# Altium PCB pcb1.PcbDoc (part 2 of 3)
Units mil, origin at the board's own origin, x right, y up, seen from the top; angles counter-clockwise.
Board outline 6735 x 5870 mil, 4 copper layers (Top Layer, Layer 1, Layer 2, Bottom Layer), stack 16.756 mil thick; 178 components, 184 nets, 959 pads, 712 vias.
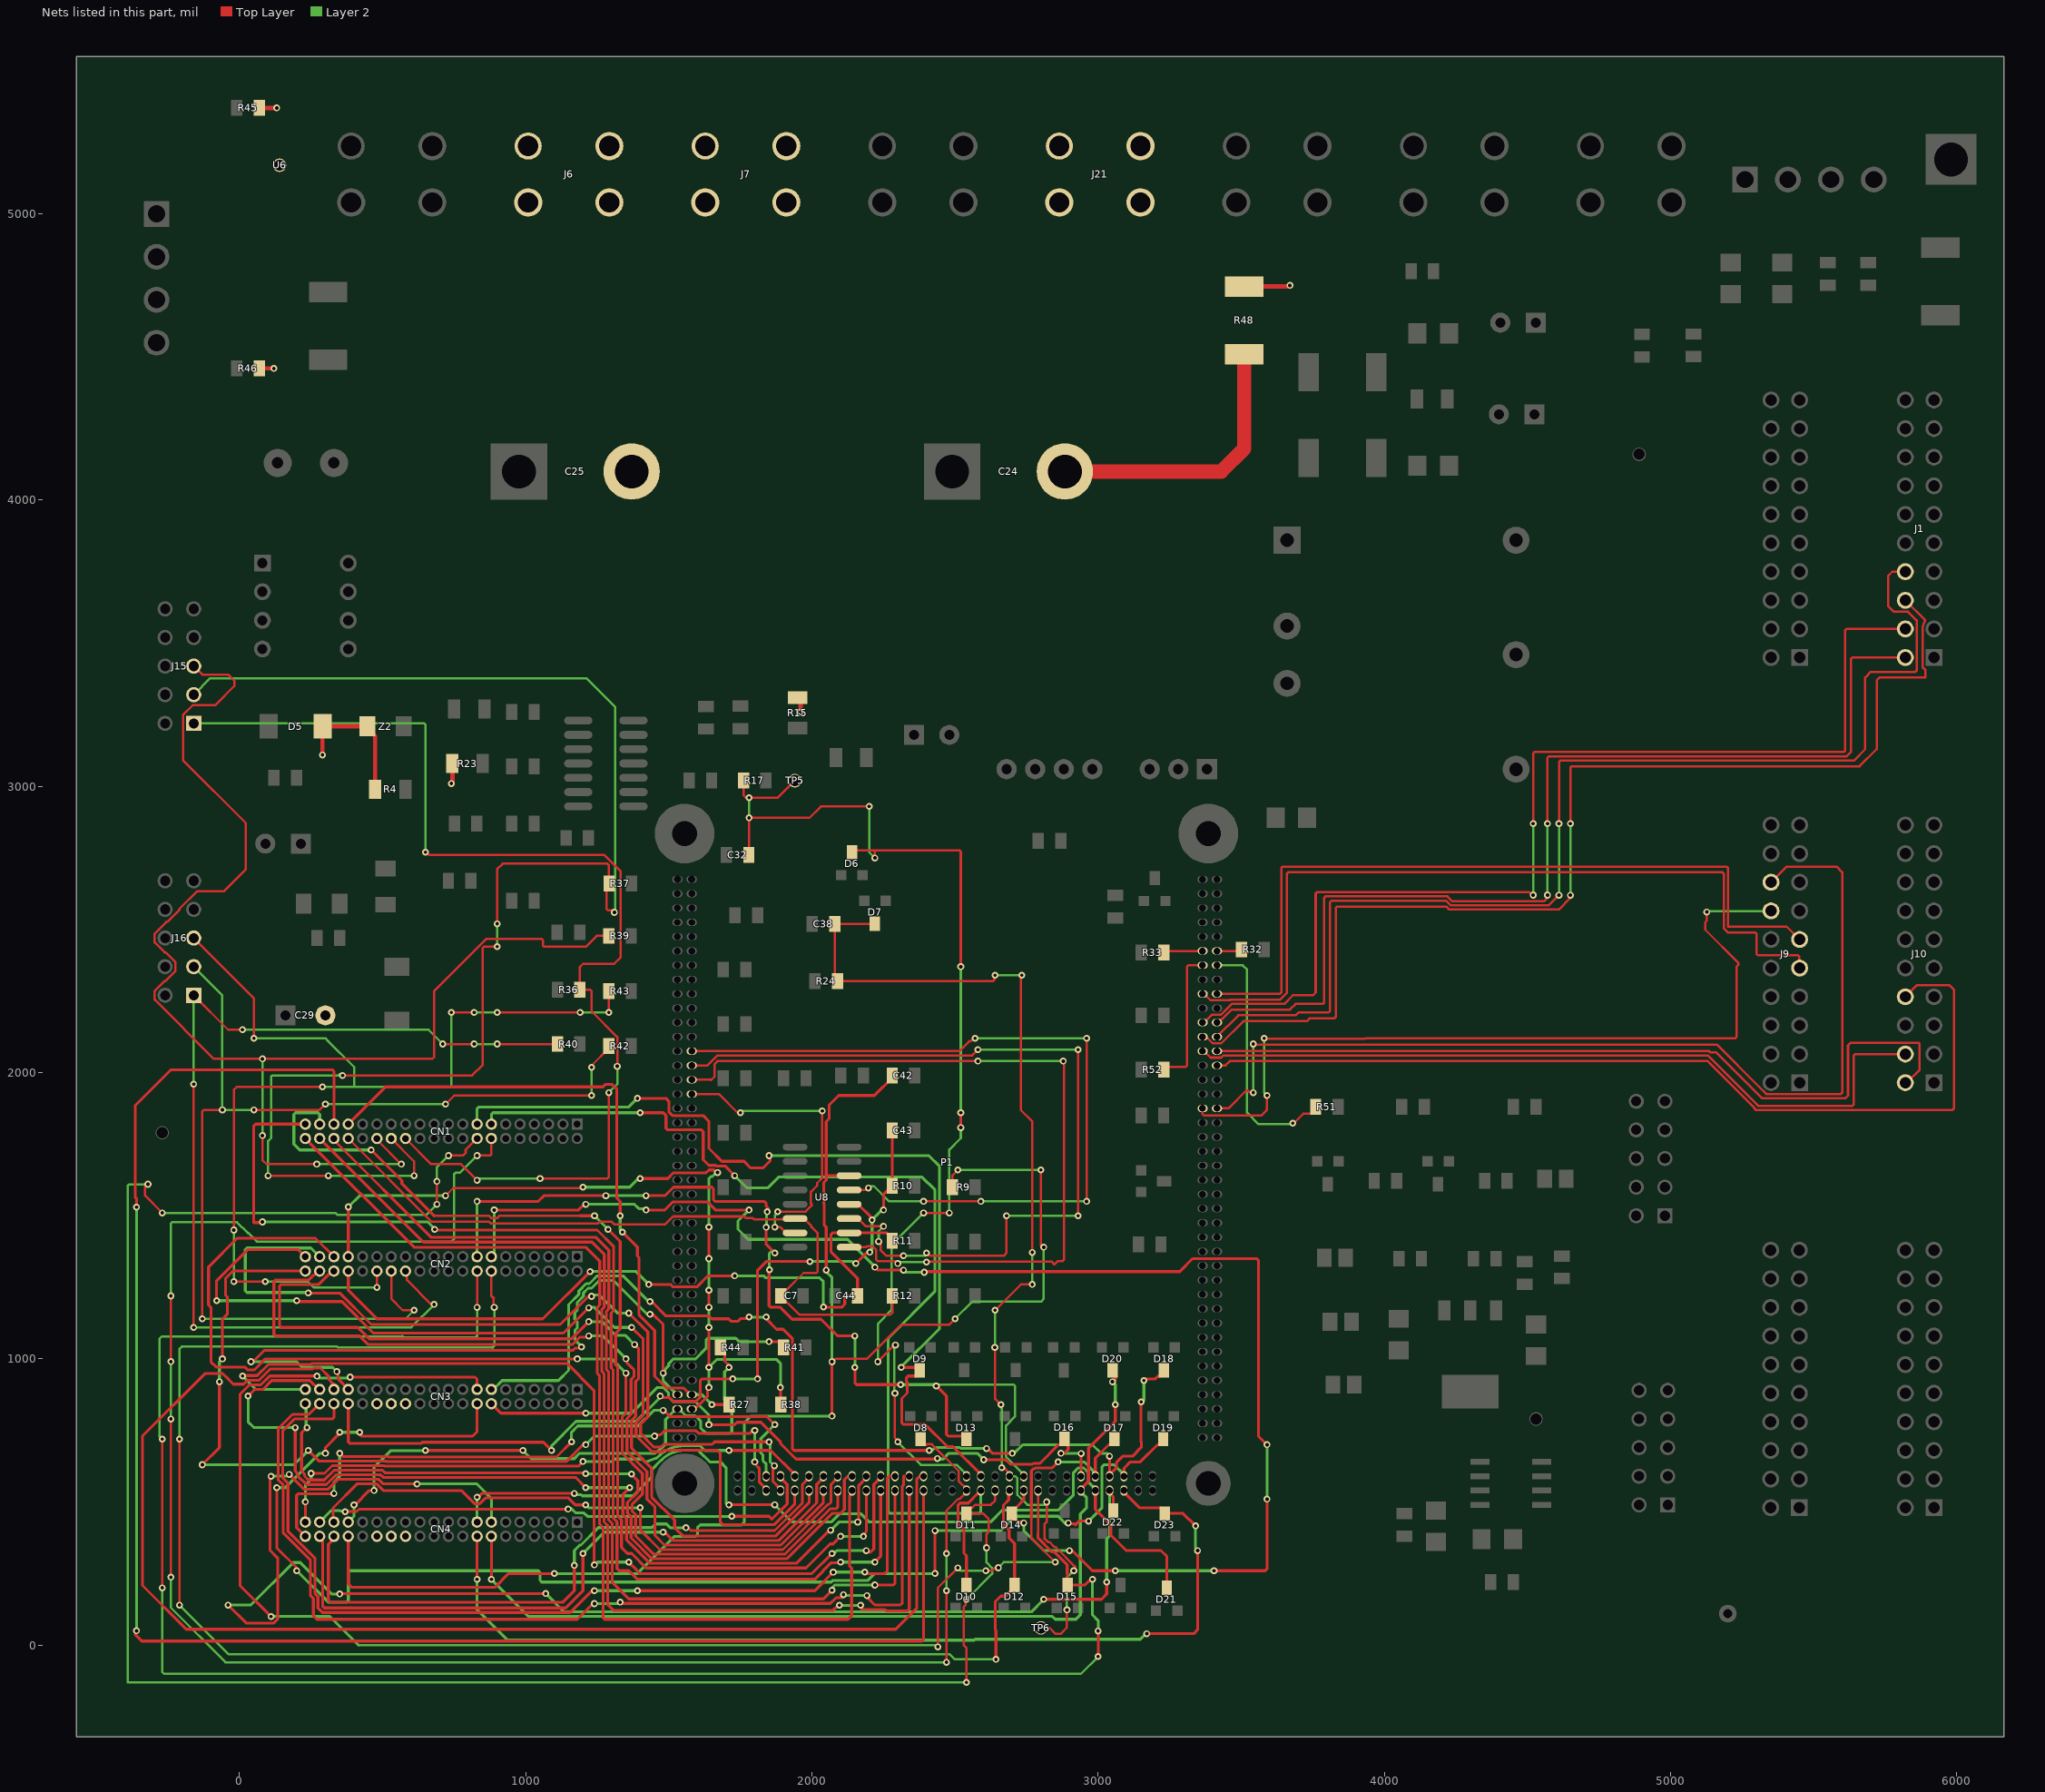
[diagram p4: the nets of this part, all layers, seen from the top]

## Via types
v1: diameter 24, hole 12, Top Layer to Bottom Layer, 712 vias

## Nets (pads, with @x,y where several pads share a name; then routed paths per layer and width w, separated by ;. In a path a pad name is that pad's centre, name@x,y a point inside that pad or via, vN(x,y) a via of type N, cw(c..) or ccw(c..) an arc to the next point about the centre after c; other vN are vias at no path point) (continued)
DSP-PWM1A: CN1.35 P1.193 | length 6070.9
  Top Layer w10: v1(-360,50) -362.68,47.32 -362.68,39.64 -364.8,37.51 -341.57,14.28 2384.14,14.28 2390,20.14 P1.193@2390,540 ; v1(-360,1530) -360,1560 -364.8,1564.8 -364.8,1884.28 -239.09,2010 324.14,2010 330,2004.14 CN1.35@330,1820
  Layer 2 w10: v1(-360,50) v1(-360,1530)
DSP-PWM1B: CN1.38 P1.195 | length 3897.3
  Top Layer w10: CN1.38@280,1770 642,1408 1232,1408 1274.5,1365.5 1274.5,1181.57 1266,1173.07 1266,955.81 1273.5,948.31 1273.5,430.43 1286.67,417.26 1286.67,140.55 1305.72,121.5 2073.85,121.5 2088.94,136.6 2093.3,136.6 v1(2095.71,139) ; v1(2170,139) 2170,138.5 2174.78,133.72 2174.78,125.07 2175.86,124 2255.7,124 2259.7,120 2334.14,120 2340,125.86 P1.195@2340,540
  Layer 2 w10: v1(2095.71,139) v1(2170,139)
DSP-PWM2A: CN1.36 P1.197 | length 3661.5
  Top Layer w10: CN1.36@330,1770 330,1764 670,1424 1246,1424 1290.5,1379.5 1290.5,1174.94 1282,1166.44 1282,962.44 1289.5,954.94 1289.5,437.06 1302.67,423.89 1302.67,218.42 1359.59,161.5 2040,161.5 v1(2070,191.5) ; v1(2220,210) 2284.14,210 2290,215.86 P1.197@2290,540
  Layer 2 w10: v1(2070,191.5) 2070,200 2080,210 v1(2220,210)
DSP-PWM2B: CN1.39 P1.199 | length 4152.4
  Top Layer w10: v1(80,1478.5) 77.36,1475.86 50,1475.86 50,1814.14 55.86,1820 143.96,1820 CN1.39@230,1820 ; v1(681.81,1452.5) 684.31,1450 1250,1450 1306.5,1393.5 1306.5,1168.31 1298,1159.81 1298,969.07 1305.5,961.57 1305.5,443.69 1318.67,430.52 1318.67,267.19 1325.86,260 1360,260 1389.7,230.3 2010,230.3 2067.5,287.8 2097.8,287.8 v1(2100,290) ; v1(2220,290) 2240,310 P1.199@2240,540
  Layer 2 w10: v1(80,1478.5) 657.24,1478.5 677.24,1458.5 677.24,1457.07 v1(681.81,1452.5) ; v1(2100,290) v1(2220,290)
DSP-PWM3A: CN1.37 P1.201 | length 3695.2
  Top Layer w8: 680,1500 871.11,1500 878.61,1492.5 901.39,1492.5 908.89,1500 1190,1500
  Top Layer w10: v1(460,1730) 567.39,1622.61 567.39,1612.61 680,1500 ; 1190,1500 v1(1240.3,1500) ; v1(1287.8,1452.5) 1330,1410.3 1330,1104.64 1314,1088.64 1314,979 1321.5,971.5 1321.5,450.31 1334.67,437.14 1334.67,341.19 1355.86,320 1370.3,320 1420.8,269.5 1979.2,269.5 2063.21,353.51 2073.51,353.51 2099.85,379.85 v1(2100.15,379.85) ; v1(2180,380) 2180,386.76 2190,396.76 P1.201@2190,540
  Layer 2 w10: CN1.37@280,1820 280,1854.14 274.14,1860 195.86,1860 190,1854.14 190,1750 210,1730 v1(460,1730) ; v1(1240.3,1500) v1(1287.8,1452.5) ; v1(2100.15,379.85) 2100.23,379.92 2179.92,379.92 v1(2180,380)
DSP-PWM3B: CN1.40 P1.203 | length 3783.3
  Top Layer w10: CN1.40@230,1770 610,1390 1210,1390 1258.5,1341.5 1258.5,1188.19 1250,1179.69 1250,949.19 1257.5,941.69 1257.5,423.8 1270,411.3 1270,95.86 1275.86,90 2125.64,90 2138.5,102.86 2138.5,268.83 2131.5,275.83 2131.5,521.94 2140,530.44 P1.203@2140,540
DSP-PWM4A: CN2.35 P1.205 | length 3822
  Top Layer w10: CN2.35@330,1356.67 265.17,1421.5 -8.19,1421.5 -108.5,1321.19 -108.5,1188.19 -100,1179.69 -100,989.69 -81.81,971.5 18.19,971.5 28.19,961.5 51.81,961.5 90.31,1000 v1(1180,1000) ; v1(1350,950) 1350,810.81 1337.5,798.31 1337.5,669.87 1407.67,599.7 1407.67,527.97 1371.5,491.81 1371.5,468.19 1384,455.69 1384,381.25 1447.75,317.5 1904.87,317.5 2063.37,476 2084.14,476 2090,481.86 P1.205@2090,540
  Layer 2 w10: v1(1180,1000) 1300,1000 v1(1350,950)
DSP-PWM4B: CN2.38 P1.207 | length 3020.4
  Top Layer w10: CN2.38@280,1306.67 273.4,1306.67 242.71,1275.98 125.86,1275.98 120,1270.12 120,1085.86 125.86,1080 420.31,1080 450.31,1050 1162.63,1050 1187.84,1075.22 1215.22,1075.22 v1(1220,1080) ; 1354,986.31 1368,972.31 1378.5,961.81 1378.5,938.19 1368,927.69 1368,806.19 1353.5,791.69 1353.5,676.5 1423.67,606.33 1423.67,510.6 1451.5,482.77 1451.5,382.69 1484.7,349.5 1891.62,349.5 2040,497.88 P1.207@2040,540
  Layer 2 w10: v1(1220,1080) 1270,1080 v1(1350,1000)
DSP-PWM5A: CN2.36 P1.209 | length 2958.3
  Top Layer w10: CN2.36@330,1306.67 323.4,1306.67 276.71,1259.98 145.86,1259.98 140,1254.12 140,1115.86 145.86,1110 412.93,1110 452.93,1070 1160,1070 v1(1220,1130) ; v1(1380,1050) 1394.5,1035.5 1394.5,931.57 1384,921.07 1384,799.56 1369.5,785.06 1369.5,688.25 1439.67,618.08 1439.67,517.23 1520,436.9 1520,409.69 1548.2,381.5 1874.13,381.5 1990,497.37 P1.209@1990,540
  Layer 2 w10: v1(1220,1130) 1266.37,1130 1314.87,1081.5 1348.5,1081.5 v1(1380,1050)
DSP-PWM5B: CN2.39 P1.211 | length 3307.9
  Top Layer w10: v1(-80,1203.5) -80,1272.93 28.42,1381.35 205.32,1381.35 CN2.39@230,1356.67 ; v1(200,1203.5) 203.5,1200 357.37,1200 467.37,1090 1131.42,1090 v1(1220.03,1178.61) ; v1(1370,1110) 1410.5,1069.5 1410.5,803.43 1385.5,778.43 1385.5,731.57 1441.57,675.5 1478.43,675.5 1483.26,680.33 1669.67,680.33 1680,670 1680,430 1688.69,421.31 1868.69,421.31 1940,492.63 P1.211@1940,540
  Layer 2 w10: v1(-80,1203.5) v1(200,1203.5) ; v1(1220.03,1178.61) 1221.42,1180 1240,1180 1310,1110 v1(1370,1110)
DSP-PWM6A: CN2.37 P1.213 | length 3004.8
  Top Layer w10: v1(240,1230) 350,1230 460,1120 1120.3,1120 1220.2,1219.9 1221.72,1218.38 v1(1230,1218.38) ; v1(1360,1159.69) 1360.61,1159.69 1426.5,1093.81 1426.5,796.81 1401.5,771.81 1401.5,738.19 1448.2,691.5 1471.8,691.5 1481.8,701.5 1651.48,701.5 1659.98,710 1849.7,710 v1(1850,709.69) ; v1(1868.5,626.69) 1863.72,621.91 1863.72,605.45 1863.5,605.23 1863.5,572 1890,545.5 P1.213@1890,540
  Layer 2 w10: v1(240,1230) 238,1232 25.86,1232 20,1237.86 20,1381.49 25.86,1387.35 249.32,1387.35 CN2.37@280,1356.67 ; v1(1230,1218.38) 1234.78,1223.16 1254.08,1223.16 1255.46,1224.54 1320,1160 1359.7,1160 v1(1360,1159.69) ; v1(1850,709.69) 1853.8,705.9 1853.8,641.4 v1(1868.5,626.69)
DSP-PWM6B: CN2.40 P1.215 | length 3224.5
  Top Layer w10: v1(-130,630) -70,690 v1(-70,920) ; v1(-60,1000) -60,1138.54 -43,1155.54 -43,1215.92 -48.5,1221.42 -48.5,1281.81 -23.64,1306.67 CN2.40@230,1306.67 ; v1(240,680) 277,643 512.66,643 514.66,641 1140.7,641 1199.7,700 v1(1210,700) ; v1(1450,730) 1454.78,734.78 1470.75,734.78 1484.46,748.5 1595.23,748.5 1603.73,740 1783.24,740 1793.24,750 v1(1800,750) ; v1(1800,640) 1800,633.24 1816.5,616.74 1816.5,569 1840,545.5 P1.215@1840,540
  Layer 2 w10: v1(-130,630) 190,630 v1(240,680) ; v1(-70,920) -70,990 v1(-60,1000) ; v1(1210,700) 1240,730 v1(1450,730) ; v1(1800,640) v1(1800,750)
DSP-PWM7A: CN3.35 P1.194 | length 4646.7
  Top Layer w10: CN3.35@330,893.33 330,911.5 328.19,911.5 311.5,928.19 311.5,939.05 282.55,968 258.94,968 255.44,964.5 107.43,964.5 68.43,925.5 28.53,925.5 14.53,911.5 -21.81,911.5 -38.5,928.19 -38.5,928.81 -58.19,948.5 -121.5,948.5 -338.94,731.06 -338.94,208.12 -186.32,55.5 2292.27,55.5 2366.5,129.73 2366.5,580.64 2375.86,590 P1.194@2390,590
DSP-PWM7B: CN3.38 P1.196 | length 3477.2
  Top Layer w10: CN3.38@280,843.33 242.67,806 185.35,806 134.58,755.24 134.58,577.94 153,559.53 153,390.98 248,295.98 248,172.6 258,162.6 258,102 270,90 1180,90 1234.87,144.87 v1(1240,144.87) ; v1(1330,150) 1334.5,145.5 2064.3,145.5 2084.02,165.22 2104.14,165.22 2110,171.07 v1(2110,176.17) ; v1(2191.98,173.11) 2191.98,168.02 2220,140 2309.14,140 2315,145.86 2315,553.73 2320,558.73 2320,590 P1.196@2340,590
  Layer 2 w10: v1(1240,144.87) 1324.87,144.87 v1(1330,150) ; v1(2110,176.17) 2112.46,173.7 2191.39,173.7 v1(2191.98,173.11)
DSP-PWM8A: CN3.36 P1.198 | length 3331.2
  Top Layer w10: CN3.36@330,843.33 330,795.86 324.14,790 191.97,790 150.58,748.61 150.58,584.57 169,566.15 169,397.6 264,302.6 264,179.23 274,169.23 274,129.23 289.23,114 1155.2,114 1231.2,190 v1(1240,190) ; v1(1390,190) 2010,190 v1(2074.5,254.5) ; v1(2184.7,255.3) 2190,250 2254.94,250 2263.34,258.39 2263.34,524.6 2263.5,524.77 2263.5,583.5 2270,590 P1.198@2290,590
  Layer 2 w10: v1(1240,190) v1(1390,190) ; v1(2074.5,254.5) 2074.9,254.9 2184.29,254.9 v1(2184.7,255.3)
DSP-PWM8B: CN3.39 P1.200 | length 3439.7
  Top Layer w10: v1(10.5,940) 12,941.5 61.81,941.5 100.81,980.5 248.81,980.5 252.31,984 1144.26,984 1238.5,889.76 1238.5,281.5 v1(1240,280) ; v1(1360,290) 1360,285.86 1365.86,280 1370,280 1391.31,258.69 1391.31,255.86 1397.17,250 2000,250 v1(2070,320) ; v1(2190,330) 2196.76,330 2202.62,324.14 2204.14,324.14 2216.5,336.5 2216.5,561 2240,584.5 P1.200@2240,590
  Layer 2 w10: v1(10.5,940) 57.17,893.33 CN3.39@230,893.33 ; v1(1240,280) 1250,290 v1(1360,290) ; v1(2070,320) 2076.76,320 2086.76,330 v1(2190,330)
DSP-PWM9A: CN3.37 P1.202 | length 3196.6
  Top Layer w10: v1(30,870) 53.5,893.5 81.69,893.5 112.21,924.02 245.92,924.02 276.61,893.33 CN3.37@280,893.33 ; v1(194.5,760) 194.5,608.03 203,599.53 203,591.85 233.85,561 303.22,561 337.22,595 492.78,595 501.78,586 1173.67,586 v1(1209.67,550) ; v1(1363.17,550) 1339.5,526.33 1339.5,454.94 1352,442.44 1352,368 1434.5,285.5 1945.5,285.5 2061.5,401.5 v1(2065.34,401.5) ; v1(2160,430) 2163.5,433.5 2163.5,558 2190,584.5 P1.202@2190,590
  Layer 2 w10: v1(30,870) 30,780 50,760 v1(194.5,760) ; v1(1209.67,550) v1(1363.17,550) ; v1(2065.34,401.5) 2093.84,430 v1(2160,430)
DSP-PWM9B: CN3.40 P1.204 | length 2669.7
  Top Layer w10: v1(235.5,760) 217,741.5 217,608.15 227,598.15 227,590.47 240.47,577 296.59,577 330.59,611 499.41,611 508.41,602 1207.03,602 v1(1209.67,599.36) ; v1(1369.28,597.78) 1371.5,595.57 1371.5,594.38 1391.67,574.21 1391.67,534.6 1355.5,498.43 1355.5,461.57 1368,449.07 1368,374.63 1441.13,301.5 1911.5,301.5 2070,460 2100,460 2113.5,473.5 2113.5,577.64 2125.86,590 P1.204@2140,590
  Layer 2 w10: CN3.40@230,843.33 232.75,840.58 232.75,762.75 v1(235.5,760) ; v1(1209.67,599.36) 1210.46,598.57 1368.49,598.57 v1(1369.28,597.78)
DSP-PWM10A: CN4.35 P1.206 | length 2151.5
  Top Layer w10: CN4.35@330,430 327,433 327,479.53 410.47,563 479.53,563 502.53,540 774.47,540 820.47,494 839.53,494 859.53,514 1149.22,514 1173.22,490 v1(1209.67,490) ; v1(1400,480) 1400,402.34 1468.84,333.5 1898.25,333.5 2056.75,492 2060,492 2066.5,498.5 2066.5,561 2090,584.5 P1.206@2090,590
  Layer 2 w10: v1(1209.67,490) 1219.67,480 v1(1400,480)
DSP-PWM10B: CN4.38 P1.208 | length 2332.1
  Top Layer w10: CN4.38@280,380 280,372.05 290,362.05 290,135.86 295.86,130 1140,130 1200,190 v1(1200,320) ; v1(1480,394.5) 1484.96,394.5 1513.96,365.5 1884.99,365.5 2016.5,497.01 2016.5,561 2040,584.5 P1.208@2040,590
  Layer 2 w10: v1(1200,320) 1274.5,394.5 v1(1480,394.5)
DSP-PWM11A: CN4.36 P1.210 | length 2239.2
  Top Layer w10: CN4.36@330,380 330,372.05 310.14,352.19 310.14,155.86 316,150 1130,150 1170,190 v1(1170,278.5) ; v1(1560,410) 1566.76,410 1576.76,400 1870,400 1966.5,496.5 1966.5,561 1990,584.5 P1.210@1990,590
  Layer 2 w10: v1(1170,278.5) 1170,330.3 1189.01,349.32 1192.71,349.32 1253.9,410.5 1440.8,410.5 1453.3,423 1491.8,423 1504.8,410 v1(1560,410)
DSP-PWM11B: CN4.39 P1.212 | length 1955.4
  Top Layer w10: CN4.39@230,430 v1(230,500.5) ; v1(250,600) 296.96,600 323.96,627 506.04,627 508.04,625 1183.5,625 v1(1200,641.5) ; v1(1710,680) 1855.5,680 1940,595.5 P1.212@1940,590
  Layer 2 w10: v1(230,500.5) 230,560 250,580 v1(250,600) ; v1(1200,641.5) 1302.85,641.5 1311.35,650 1407.44,650 1412.87,644.57 1415.77,641.67 1424.05,641.67 1456.17,653.24 1458.23,653.98 1462.37,658.1 cw(c1555,565) 1541.93,695.68 1548.37,696.33 1609.4,696.33 1612.33,693.4 1625.73,680 v1(1710,680)
DSP-PWM12A: CN4.37 P1.214 | length 1800.7
  Top Layer w10: v1(369.25,466.12) 370.13,467 409.53,467 417.4,474.87 v1(1148.04,474.87) ; v1(1720,450) 1850,450 1860,440 1913.5,493.5 1913.5,561 1890,584.5 P1.214@1890,590
  Layer 2 w10: CN4.37@280,430 320,470 350,470 351.2,468.8 366.58,468.8 v1(369.25,466.12) ; v1(1148.04,474.87) 1150.83,477.65 1159.11,477.65 1175.26,461.5 1203.43,461.5 1215.26,449.67 1719.67,449.67 v1(1720,450)
DSP-PWM12B: CN4.40 P1.216 | length 2279.3
  Top Layer w10: CN4.40@230,380 199.32,410.68 199.32,523.14 205.17,529 329,529 v1(330,530) ; v1(350,670) 361,659 519.29,659 521.29,657 1107,657 v1(1160,710) ; v1(1480,820) 1482.96,820 1504.46,798.5 1841.5,798.5 1869.85,770.15 v1(1870.15,770.15)
  Layer 2 w10: v1(330,530) 330,570 350,590 v1(350,670) ; v1(1160,710) 1160,743.7 1181.8,765.5 1392.27,765.5 1446.77,820 v1(1480,820) ; P1.216@1840,590 1840,632.57 1828.5,644.07 1828.5,664.37 1821.5,671.37 1821.5,721.81 1869.7,770 1870,770 v1(1870.15,770.15)
DSP_A_CAN_RX: J9.9 P1.18 | length 2839.2
  Top Layer w8: P1.18@3365,2275 3370.5,2275 3393,2252.5 3460.02,2252.5 3461.52,2254 3634.11,2254 3660,2279.89 3660,2695.31 3664.69,2700 5181.31,2700 5186,2695.31 5186,2504 5200,2490 5295.31,2490 5300,2485.31 5300,2414.69 5304.69,2410 5445.31,2410 5450,2405.31 5450,2365.91 J9.9@5450.91,2365
DSP_A_CAN_TX: J9.11 P1.17 | length 2701.3
  Top Layer w8: P1.17@3415,2275 3635.31,2275 3640,2279.69 3640,2715.31 3644.69,2720 5195.31,2720 5200,2715.31 5200,2510 5405.91,2510 J9.11@5450.91,2465
DSP_B_CAN_RX: J9.14 P1.34 | length 2878.4
  Top Layer w8: P1.34@3365,1875 3365,1855 3370,1850 3570,1850 3590,1870 v1(3590,1920) ; v1(3580,2120) 3582,2118 3933.29,2118 3935.29,2120 5225.31,2120 5230,2124.69 5230,2370 5236.69,2376.69 5236.69,2383.31 5121.25,2498.75 5121.25,2525.21 5126.5,2530.46 v1(5126.5,2561.25)
  Layer 2 w8: v1(3580,2120) 3580,1930 v1(3590,1920) ; v1(5126.5,2561.25) 5128.38,2563.12 5349.03,2563.12 J9.14@5350.91,2565
DSP_B_CAN_TX: J9.16 P1.33 | length 3507.6
  Top Layer w8: P1.33@3415,1875 3455,1875 3516.69,1936.69 3523.31,1936.69 3526.94,1933.06 3536.94,1933.06 3540,1930 v1(3542,1930) ; v1(3542,2100) 3544,2098 5162,2098 5310,1950 5334.53,1925.47 5595.31,1925.47 5600,1930.16 5600,2700 5580,2720 5405.91,2720 J9.16@5350.91,2665
  Layer 2 w8: v1(3542,1930) v1(3542,2100)
DSP_PWM1_\E\N\A\B\L\E: CN1.33 P1.153 R27.1 | length 2361.3
  Top Layer w10: CN1.33@380,1820 510,1950 1269.7,1950 1278.2,1958.5 1301.8,1958.5 1318.5,1941.8 1318.5,1561.5 1330,1550 v1(1330,1500) ; v1(1338.11,1442.5) 1390,1390.61 1390,1360 1395.25,1354.75 1395.25,1154.44 1450.5,1099.19 1450.5,939.19 1491.2,898.5 1551,898.5 1574.5,875 P1.153@1580,875 ; v1(1650,840) R27.1@1710.63,840
  Layer 2 w10: v1(1330,1500) 1330,1450.61 v1(1338.11,1442.5) ; P1.153@1580,875 1615,875 v1(1650,840)
DSP_PWM1_F\A\U\L\T\: P1.111 U8.7 | length 1100.3
  Top Layer w8: P1.111@1580,1925 1675,1925 1741.69,1858.31 1748.31,1858.31 v1(1750,1860) ; v1(1870,1460) 1890.22,1460 1910.22,1440 U8.7@1941.02,1440 ; v1(1880,1514.44) 1977.81,1514.44 1998.37,1535 1998.37,1541.63 1996.69,1543.31 1996.69,1583.32 2018.19,1604.83 2018.19,1613.93 2035,1630.74 2035,1865 v1(2036.25,1866.25)
  Layer 2 w8: v1(1750,1860) 1756.25,1866.25 v1(2036.25,1866.25) ; v1(1870,1460) 1870,1500.11 1880,1510.11 v1(1880,1514.44)
DSP_PWM1_F\A\U\L\T\_\5\V\: C7.1 CN1.34 R12.2 U8.6 | length 2598.2
  Top Layer w8: CN1.34@380,1770 670,1480 871.31,1480 878.81,1472.5 1251.7,1472.5 1259.2,1480 1299.2,1480 1309.2,1470 1487.68,1470 1515.18,1497.5 1763.61,1497.5 1768.61,1492.5 1792.5,1492.5 1797.5,1487.5 1938.52,1487.5 U8.6@1941.02,1490 1972.52,1490 1998,1464.52 1998,1460.89 2020,1438.89 2020,1304.69 2015.31,1300 1970.63,1300 1914.19,1243.56 1906.32,1243.56 1890.63,1227.87 C7.1@1890.63,1220 1890.63,1212.13 1906.32,1196.44 1914.19,1196.44 1957.13,1153.5 2038.02,1153.5 2038.09,1153.42 2273.42,1153.42 2280.63,1160.63 R12.2@2280.63,1220
DSP_PWM2_\E\N\A\B\L\E: CN2.33 P1.155 R38.1 | length 2808.7
  Top Layer w8: v1(720,1570) 746.5,1596.5 1196.5,1596.5 v1(1200,1600)
  Top Layer w10: CN2.33@380,1356.67 v1(380,1530.78) ; v1(1400,1630) 1496.27,1630 1516.27,1650 1630,1650 1640,1660 1657.21,1660 1666.21,1651 v1(1670,1651) ; P1.155@1580,825 1589.56,825 1600.06,835.5 1601.86,835.5 1635.22,868.86 1635.22,895.22 v1(1640,900) ; v1(1640,970) v1(1640,1110) ; v1(1640,1180) v1(1640,1240) ; v1(1640,1350) v1(1640,1460) ; v1(1890,900) 1890,840.63 R38.1@1890.63,840
  Layer 2 w10: v1(380,1530.78) 419.22,1570 v1(720,1570) ; v1(1200,1600) 1363.24,1600 1393.24,1630 v1(1400,1630) ; v1(1640,900) v1(1640,970) 1668.5,998.5 1875.64,998.5 1890,984.14 v1(1890,900) ; v1(1640,1110) v1(1640,1180) ; v1(1640,1240) v1(1640,1350) ; v1(1640,1460) 1640,1630 1647.07,1637.07 1652.28,1637.07 1666.21,1651 v1(1670,1651)
DSP_PWM2_F\A\U\L\T\: P1.109 U8.9 | length 2857.4
  Top Layer w8: P1.109@1580,1975 1645,1975 1646.69,1973.31 1660,1986.63 1660,2030 1670,2040 v1(2580,2040) ; U8.9@2130,1390 2188.89,1390 2193.26,1394.37 2211.49,1394.37 2224.37,1381.49 2224.37,1346.69 2229.06,1342 2291,1342 v1(2300,1333) ; v1(2400,1338) 2402,1340 2837.31,1340 2847.31,1330 2859.31,1342 2875.31,1342 2880,1346.69 2880,2038 v1(2878,2040)
  Layer 2 w8: v1(2300,1333) 2305,1338 v1(2400,1338) ; v1(2580,2040) v1(2878,2040)
DSP_PWM2_F\A\U\L\T\_\5\V\: C44.1 CN2.34 R11.2 U8.10 | length 2605.9
  Top Layer w10: CN2.34@380,1306.67 380,1240 480,1140 1059.7,1140 v1(1224.85,1305.15) ; v1(1430,1260) 1506.27,1260 1514.77,1251.5 1598.13,1251.5 1636.63,1290 v1(1730,1290) ; v1(2040.07,1180.92) 2040.99,1180 2103.43,1180 2114.78,1191.35 2114.78,1210.09 2124.68,1220 C44.1@2159.37,1220 2159.37,1280.63 2066,1374 2066,1434.14 2071.86,1440 U8.10@2130,1440 2261,1440 2280.63,1420.37 R11.2@2280.63,1412.5
  Layer 2 w10: v1(1224.85,1305.15) 1225.7,1306 1384,1306 v1(1430,1260) ; v1(1730,1290) 1831.2,1290 1838.2,1283 2027,1283 2040,1270 2040,1180.99 v1(2040.07,1180.92)
DSP_PWM3_\E\N\A\B\L\E: CN3.33 P1.154 R41.1 | length 2926.3
  Top Layer w10: v1(40,990) 47.68,990 87.68,1030 1165.25,1030 1172.35,1037.1 1190.03,1037.1 v1(1194.81,1041.88) ; v1(340,955.5) 344.78,950.72 344.78,928.55 CN3.33@380,893.33 ; v1(1434,1156) 1444,1156 1480,1120 v1(1480,950) ; v1(1850,1060) 1885.94,1060 1900.63,1045.31 R41.1@1900.63,1040
  Layer 2 w10: v1(40,990) 200,990 220,970 325.5,970 v1(340,955.5) ; v1(1194.81,1041.88) 1194.81,1043.45 1172.62,1065.65 1172.62,1101 1180,1108.38 1180,1129.69 1171.5,1138.19 1171.5,1161.81 1180,1170.31 1180,1197.37 1201.5,1218.87 1201.5,1230.19 1218.2,1246.88 1229.51,1246.88 1256.63,1274 1306,1274 1424.86,1155.14 1433.14,1155.14 v1(1434,1156) ; P1.154@1530,875 1527.93,875 1480,922.93 v1(1480,950) 1480,956.41 1499.77,976.19 1499.77,983.51 1515.65,999.39 1593.12,999.39 1630,1036.27 1630,1065.64 1635.86,1071.5 1733.8,1071.5 1745.3,1060 v1(1850,1060)
DSP_PWM3_F\A\U\L\T\: P1.107 U8.11 | length 3020.7
  Top Layer w8: P1.107@1580,2025 1635,2025 1670,2060 2560,2060 v1(2580,2080) ; U8.11@2130,1490 2161.5,1490 2188.5,1463 v1(2250,1463) ; v1(2233,1410) 2233,1407 2240,1400 2240,1380 2260,1360 v1(2320,1360) ; v1(2400,1370) 2402.69,1370 2412.69,1360 2670,1360 2680,1370 v1(2680,1500) ; v1(2930,1500) v1(2930,2080)
  Layer 2 w8: v1(2233,1410) 2233,1446 v1(2250,1463) ; v1(2320,1360) 2395.31,1360 2395.31,1360.98 2400,1365.67 v1(2400,1370) ; v1(2580,2080) v1(2930,2080) ; v1(2680,1500) v1(2930,1500)
DSP_PWM3_F\A\U\L\T\_\5\V\: C43.1 CN3.34 R10.2 U8.12 | length 3114.5
  Top Layer w10: CN3.34@380,843.33 380,710 385.86,704.14 633.84,704.14 638.19,708.5 1061.5,708.5 v1(1090,680) ; v1(1470.15,869.85) 1474.78,865.22 1501.05,865.22 1514.77,851.5 1595.23,851.5 1609,865.27 1609,869 1610,870 1610,924.14 1615.86,930 v1(1723.37,930) ; v1(1810,930) 1810,1310 1840,1340 v1(1992.5,1340) ; U8.12@2130,1540 2161.5,1540 2205.22,1496.28 2205.22,1493.57 2210,1488.79 v1(2210,1485) ; v1(2153.53,1333.53) 2190,1370 2200,1370 v1(2202.37,1372.37) ; v1(2250,1520) 2250,1574.37 R10.2@2280.63,1605 C43.1@2280.63,1797.5
  Layer 2 w10: v1(1090,680) 1090,696.33 1175.17,781.5 1385.64,781.5 1470.15,866.01 v1(1470.15,869.85) ; v1(1723.37,930) v1(1810,930) ; v1(1992.5,1340) 2140.3,1340 2146.77,1333.53 v1(2153.53,1333.53) ; v1(2202.37,1372.37) 2202.37,1376.16 2210,1383.79 v1(2210,1485) 2245,1520 v1(2250,1520)
DSP_PWM4_\E\N\A\B\L\E: CN4.33 P1.156 R44.1 | length 2022.9
  Top Layer w10: v1(400,490) 403.63,490 453.63,540 v1(470,540) ; v1(650,680) v1(990,680) ; R44.1@1680.63,1040 1695.32,1025.31 1695.32,991.45 1710,976.76 v1(1710,970)
  Layer 2 w10: CN4.33@380,430 400,450 v1(400,490) ; v1(470,540) 470,622 527,679 649,679 v1(650,680) ; v1(990,680) 1018.5,651.5 1169.7,651.5 1188.2,670 1451.65,670 1459.47,677.82 1460.43,677.97 cw(c1555,565) 1470.25,685.51 1475.75,689.38 1476.46,689.88 1488.5,701.92 1488.5,788.19 1525.3,825 P1.156@1530,825 1535.5,825 1559,801.5 1592.23,801.5 1610.96,782.77 1610.96,758.73 1629.7,740 1714.14,740 1720,745.86 1720,831.27 1694.87,856.4 1694.87,954.87 v1(1710,970)
DSP_PWM4_F\A\U\L\T\: P1.105 U8.13 | length 2825.5
  Top Layer w8: P1.105@1580,2075 2515,2075 2550,2110 2555.67,2110 2565.67,2120 v1(2570,2120) ; U8.13@2130,1590 2185.67,1590 2192.74,1597.07 v1(2197.07,1597.07) ; v1(2390,1550) v1(2590,1550) ; v1(2959.5,1550) v1(2959.5,2120)
  Layer 2 w8: v1(2197.07,1597.07) 2201.4,1597.07 2207.95,1603.62 2216.38,1603.62 2270,1550 v1(2390,1550) ; v1(2570,2120) v1(2959.5,2120) ; v1(2590,1550) v1(2959.5,1550)
DSP_PWM4_F\A\U\L\T\_\5\V\: C42.1 CN4.34 R9.2 U8.14 | length 5429.6
  Top Layer w8: v1(2070,990) 2072.69,990 2082.69,1000 2191.82,1000 2311.82,1120 2480,1120 v1(2500,1140) ; R9.2@2490.63,1600 2490.63,1640.63 v1(2510,1660) ; v1(2800,1660) 2800,1394.69 2800.98,1394.69 2805.67,1390 v1(2810,1390)
  Top Layer w10: CN4.34@380,380 380,214.36 392.86,201.5 891.81,201.5 940.3,250 v1(1100,250) ; v1(2050,1310) 2050,1460.03 2043,1467.03 2043,1540.49 2041.21,1542.28 2041.21,1615.74 2050,1624.52 2050,1645.86 ; v1(2070,800) v1(2070,990) ; U8.14@2130,1640 2055.86,1640 2050,1645.86 ; C42.1@2280.63,1990 2280.63,1982.13 2218.5,1920 2093.43,1920 2060,1886.57 2060,1838.79 2050,1828.79 2050,1645.86
  Layer 2 w8: v1(2500,1140) 2560,1200 2800,1200 2810,1210 v1(2810,1390) ; v1(2510,1660) v1(2800,1660)
  Layer 2 w10: v1(1100,250) 1390,250 1520,380 1594.14,380 1600,385.86 1600,410 1610,420 1754.14,420 1763.5,429.36 1763.5,776.5 1787,800 v1(2070,800) ; v1(2050,1310) 2050,1304.04 2070,1284.04 v1(2070,990)
GND: C25.2 C29.2 D5.1 J6.1 J7.1 J21.1 R4.2 R15.1 R23.1 R45.1 R46.1 R48.2 U6.1 Z2.1 | length 943
  Top Layer w15: R46.1@69.37,4460 v1(120,4460) ; R45.1@69.37,5370 v1(130,5370) ; v1(290,3110) 290,3209.46 D5.1@290.28,3209.74 290.54,3210 Z2.1@447.01,3210 447.01,3202.13 473.7,3175.43 R4.2@473.7,2990 ; v1(740,3010) 740,3012.44 743.7,3016.14 R23.1@743.7,3080 ; R15.1@1950,3310 1960,3300 v1(1960,3260) ; R48.2@3510,4746.22 3663.79,4746.22 3667.56,4750 v1(3670,4750)
  Top Layer w60: J6.1@1008.57,5236.85 J6.1@1017.9,5236.85 ; J6.1@1281.64,5236.85 J6.1@1292.04,5236.85 ; C25.2@1370,4100 C25.2@1370,4137.03
GND_SUS: C24.2 R48.1 | length 1017.7
  Top Layer w50: C24.2@2903.7,4080 C24.2@2883.7,4100 3430,4100 3510,4180 R48.1@3510,4510
IPM_IU1: CN1.14 D8.3 P1.187 | length 6491.6
  Top Layer w8: v1(-240,237.28) v1(-240,790) ; v1(-240,990.5) v1(-240,1220) ; v1(830,1710) 875.31,1710 880,1714.69 CN1.14@880,1770 ; D8.3@2380,720 2380,713 2394,699 2397.89,699 2400.89,702 2419.11,702 2512.5,608.61 2512.5,573 2540,545.5 P1.187@2540,540 2540,534.5 2516.5,511 2511.23,511 2470,469.77 v1(2470,320) ; v1(2470,-60) v1(2470,190)
  Layer 2 w8: v1(-240,237.28) -240,131.11 -48.89,-60 v1(2470,-60) ; v1(-240,790) v1(-240,990.5) ; v1(-240,1220) -240,1472.81 -235.31,1477.5 -8.61,1477.5 28.89,1440 30,1440 60,1410 740,1410 750,1420 750,1645.31 754.69,1650 770,1650 v1(830,1710) ; v1(2470,190) v1(2470,320)
IPM_IU2: CN2.14 D12.3 P1.181 | length 5852.1
  Top Layer w8: v1(-210,140) v1(-210,720) ; 880,1220 CN2.14@880,1306.67 ; v1@887.5,1182.5 887.5,1212.5
  Top Layer w10: 880,1220 887.5,1212.5 ; v1@887.5,1182.5 v1(890,1180) ; v1(2643,-50) 2643,50.98 2640,53.98 2640,151.17 2659.7,170.87 2676.26,170.87 2707.98,202.59 D12.3@2707.98,209.59 2707.98,355.03 2688.98,374.03 2688.98,402.14 2668.98,422.14 2668.98,489.14 2687.13,507.3 2687.13,537.13 P1.181@2690,540
  Layer 2 w8: v1(-210,140) -37.5,-32.5 2481.39,-32.5 2498.89,-50 v1(2643,-50) ; v1(-210,720) -210,1034.14 -201.14,1043 340,1043 343,1040 884.14,1040 ; 890,1045.86 v1(890,1180)
  Layer 2 w10: 884.14,1040 890,1045.86
IPM_IU3: CN3.14 D16.3 P1.172 | length 2485.2
  Top Layer w10: CN3.14@880,843.33 913.33,810 v1(1210,810) ; v1(1640,770) 1729.88,770 1738.38,778.5 1821.5,778.5 1890,710 1890,704.55 1944.55,650 2436,650 v1(2438,652) ; v1(2600.09,647.5) 2676.7,647.5 2692.7,631.5 2770.14,631.5 2773.64,635 2796.61,635 2862.02,700.41 2869.02,700.41 2882.02,713.41 D16.3@2882.02,720.41 2895.02,707.41 2895.02,683.34 2881.68,670 v1(2870,670) ; P1.172@2940,590 2940.28,590.28 2940.28,669.17 v1(2940.56,669.44)
  Layer 2 w10: v1(1210,810) 1370,810 1460,900 1480.3,900 1498.65,881.65 1498.65,867.61 1515.09,851.17 1592.56,851.17 1640,803.73 v1(1640,770) ; v1(2438,652) 2440,650 2458.5,650 2478.5,670 2577.59,670 v1(2600.09,647.5) ; v1(2870,670) 2940,670 v1(2940.56,669.44)
IPM_IU4: CN4.14 D20.3 P1.171 | length 3211.6
  Top Layer w10: v1(880,230) CN4.14@880,380 ; P1.171@2940,540 2940,545.5 2966.5,572 2966.5,688.06 3060,781.56 v1(3060,840) ; v1(3050,920) 3053.79,920 3059.65,925.86 3060,925.86 3060,950 D20.3@3050,960 D20.3@3050,963.5
  Layer 2 w10: v1(880,230) 1010,100 2840.47,100 2850.47,90 2922.06,90 2937.92,105.86 2937.92,458.22 2959.45,479.75 2959.45,515.05 2940,534.5 P1.171@2940,540 ; v1(3050,920) 3060,910 v1(3060,840)
IPM_IV1: CN1.15 D9.3 P1.186 | length 3327.1
  Top Layer w10: v1(1390,1910) 1490,1910 1500,1900 1500,1862.63 1512.63,1850 1620,1850 1640,1830 1640,1735.25 1685.25,1690 1762.63,1690 1785.63,1667 1829.53,1667 1854,1691.47 1854,1710 v1(1850,1710) ; v1(2312,970) 2367,970 D9.3@2377,960 2377,953 2364,940 2335.86,940 2330,934.14 2330,922.53 2333,919.53 2333,880.54 2314,861.54 2314,776.86 2319.86,771 2395.44,771 2472.54,693.91 2491.59,693.91 2590,595.5 P1.186@2590,590
  Layer 2 w10: CN1.15@830,1820 830,1874.14 835.86,1880 1360,1880 v1(1390,1910) ; v1(1850,1710) 2408.29,1710 2446,1672.29 2446,1106 2312,972 v1(2312,970)
IPM_IV2: CN2.15 D13.3 P1.180 | length 3369
  Top Layer w10: v1(830,1550) 1043.36,1550 1063.36,1570 v1(1280,1570) ; v1(1420,1570) 1486.27,1570 1516.27,1600 1650,1600 1655.86,1594.14 1655.86,1555.86 1661.72,1550 1833.71,1550 1840.25,1543.46 1840.25,1533.54 1847.75,1526.04 1846.42,1524.7 1846.42,1516.42 v1(1843.74,1513.74) ; v1(1840,1459.54) 1840,1400 v1(1870,1370) ; v1(1851.8,1311.5) 1850,1309.69 1850,1185.86 1855.86,1180 1890,1180 1931.5,1138.5 2031.8,1138.5 2090.3,1080 v1(2150,1080) ; v1(2150,970) 2150,915.86 2155.86,910 v1(2310,910) ; v1(2434.43,905.13) 2434.87,905.13 2470,870 2470,735.86 2475.86,730 2530,730 D13.3@2540,720
  Layer 2 w8: v1@2431.03,908.54 2432.49,910 2434.43,910 2705.31,910 2710,905.31 2710,799.1 2678,767.1 2678,657.5 2740,595.5 P1.180@2740,590
  Layer 2 w10: CN2.15@830,1356.67 v1(830,1550) ; v1(1280,1570) v1(1420,1570) ; v1(1840,1459.54) 1841.87,1461.41 1841.87,1511.87 v1(1843.74,1513.74) ; v1(1851.8,1311.5) 1850.9,1312.4 1850.9,1369.1 1861.8,1380 1870,1371.81 v1(1870,1370) ; v1(2150,970) v1(2150,1080) ; v1(2310,910) 2429.56,910 2431.03,908.54 v1(2434.43,905.13)
IPM_IV3: CN3.15 D17.3 P1.170 | length 5535.4
  Top Layer w8: v1(2440,-6) 2440,200 v1(2510,270) ; v1(2607.5,260) 2630,260 2640,270 2651.42,270 v1(2651.48,270.06) ; 2766.5,373.5 2766.5,443.81 ; 2768.5,371.5 v1(2850,290)
  Top Layer w10: v1(110,100) 1.5,208.5 1.5,875.85 35.15,909.5 75.06,909.5 105.58,940.02 270.23,940.02 v1(270.75,939.5) ; v1(386.25,936.25) 821.99,936.25 830,928.24 CN3.15@830,893.33 ; 2766.5,373.5 2768.5,371.5 ; 2766.5,443.81 2766.5,609.64 2772.36,615.5 2776.77,615.5 2780.27,619 2839,619 v1(2860,640) ; P1.170@2990,590 2990,653 3037,700 3044,700 3057,713 D17.3@3057,720
  Layer 2 w8: 415.86,0 2435.31,0 2440,-4.69 v1(2440,-6) ; v1(2510,270) 2520,260 v1(2607.5,260) ; v1(2651.48,270.06) 2651.48,271.48 2670,290 v1(2850,290)
  Layer 2 w10: v1(110,100) 315.86,100 415.86,0 ; v1(270.75,939.5) 277.75,932.5 382.5,932.5 v1(386.25,936.25) ; v1(2860,640) 2951.36,640 2982.5,608.86 2982.5,607.06 2990,599.56 P1.170@2990,590
IPM_IV4: CN4.15 D21.3 P1.169 | length 3226.3
  Top Layer w10: v1(830,517) 833.79,517 846.79,530 v1(1170,530) ; v1(1710,490) 1710.08,490.08 1869.77,490.08 v1(1869.85,490.15) ; P1.169@2990,540 2990,474.44 3044,420.44 3044,384.44 3097.86,330.58 3219.42,330.58 3240,310 D21.3@3240,200
  Layer 2 w10: CN4.15@830,430 v1(830,517) ; v1(1170,530) 1174.78,525.22 1194.15,525.22 1197.86,521.5 1374.97,521.5 1439.67,586.19 1439.67,612.77 1445.53,618.63 1464.89,637.98 1472.73,645.82 cw(c1555,565) 1555,680.33 1602.77,680.33 1605.7,677.4 1643.1,640 1680,640 1700,620 1700,495.86 1705.86,490 v1(1710,490) ; v1(1869.85,490.15) 1930,430 2067.37,430 2095.87,458.5 2171.8,458.5 2200.3,430 2623.28,430 2664.78,471.5 2860.23,471.5 2913.5,524.77 2913.5,602.23 2930.27,619 2949.73,619 2966.5,602.23 2966.5,569 2990,545.5 P1.169@2990,540
IPM_IW1: CN1.13 D10.3 P1.185 | length 3800
  Top Layer w10: v1(1400,1860) 1480,1860 1490,1850 1490,1805.86 1495.86,1800 1614.14,1800 1620,1794.14 1620,1695.86 1639.86,1676 1663.84,1676 1665.84,1674 1696,1674 v1(1730,1640) ; D10.3@2540,210 2540,311.78 2531,320.78 2531,402.56 2525,408.56 2511,422.56 2511,489.56 2517.44,496 2546,496 2581.63,531.63 2583.07,531.63 2590,538.56 P1.185@2590,540
  Layer 2 w10: CN1.13@880,1820 880,1854.14 885.86,1860 v1(1400,1860) ; v1(1730,1640) 1773,1597 1844.88,1597 1882.88,1635 2385,1635 2430,1590 2430,1236.2 2266.5,1072.7 2266.5,465.86 2272.36,460 2584.14,460 2590,465.86 P1.185@2590,540
IPM_IW2: CN2.13 D14.3 P1.179 | length 5271.2
  Top Layer w10: v1(890,1520) 1184.04,1520 1204.04,1540 v1(1210,1540) ; v1(1420,1520) 1486.27,1520 1514.77,1548.5 1634.75,1548.5 1663.25,1520 v1(1780,1520) ; v1(2220,1320) 2230,1310 v1(2320,1310) ; v1(2392.5,1302.5) 2395,1305 3285,1305 3330,1350 3554.14,1350 3560,1344.14 3560,730 v1(3590,700) ; v1(2740,427) 2737.32,429.68 2720.89,429.68 2697.98,452.59 2697.98,466.59 2710.98,479.59 2712.59,479.59 2740,507 P1.179@2740,540 ; v1(2900,330) 2910,330 2980,260 v1(3060,260) ; v1(3404.72,260) 3584.14,260 3590,265.86 v1(3590,510)
  Layer 2 w10: CN2.13@880,1356.67 890,1366.67 v1(890,1520) ; v1(1210,1540) 1380,1540 1395.22,1524.78 1415.22,1524.78 v1(1420,1520) ; v1(1780,1520) 1741.5,1481.5 1741.5,1453.2 1777.2,1417.5 2124.72,1417.5 2220,1322.22 v1(2220,1320) ; v1(2320,1310) 2327.5,1302.5 v1(2392.5,1302.5) ; v1(2740,427) 2740,400 2810,330 v1(2900,330) ; v1(3060,260) v1(3404.72,260) ; v1(3590,510) v1(3590,700)
IPM_IW3: CN3.13 D18.3 P1.168 | length 3561.7
  Top Layer w10: v1(1434,1200) 1440.3,1200 1490.3,1150 1640,1150 1650,1140 1708.62,1140 1717.12,1131.5 1741.8,1131.5 1751.52,1141.22 1775.22,1141.22 v1(1780,1146) ; v1(1840,1146) 1840,1140 1876.33,1103.67 1899.76,1103.67 1931.32,1072.12 1931.32,685.86 1937.17,680 v1(2410,680) ; v1(2610,687) 2613.79,687 2630.79,670 v1(2700,670) ; P1.168@3040,590 P1.168@3040,595.5 ; v1(3040,660) P1.168@3040,595.5 ; v1(3150,849.5) 3150,710 3150.86,709.14 3150.86,690.86 3120,660 3085.86,660 3064.36,638.51 3064.36,619.86 P1.168@3040,595.5 ; v1(3160,924.14) 3165.86,930 3200,930 3210,940 3217,940 3230,953 D18.3@3230,960
  Layer 2 w10: CN3.13@880,893.33 886.6,893.33 917.29,924.02 1114.02,924.02 1150,960 1150,1190 1185.5,1225.5 1185.5,1236.81 1211.57,1262.88 1222.88,1262.88 1250,1290 1340,1290 1430,1200 v1(1434,1200) ; v1(1780,1146) v1(1840,1146) ; v1(2410,680) 2420,680 2430,690 2516.61,690 2519.61,687 v1(2610,687) ; v1(2700,670) 2706.76,670 2736.76,700 2980,700 3010,670 3030,670 v1(3040,660) ; v1(3150,849.5) 3153.64,849.5 3160,855.86 v1(3160,924.14)
IPM_IW4: CN4.13 D22.3 P1.167 | length 5305.5
  Top Layer w10: v1(-40,140) 23,77 119.53,77 133,90.47 133,304.47 107,330.47 107,587 v1(110,590) ; v1(173.58,596.42) 225,545 309.85,545 343.85,579 486.15,579 502.15,563 v1(620,563) ; v1(350,178.5) 350.75,179.25 1069.25,179.25 v1(1070,180) ; v1(2810,160) 3011.56,160 3030,178.44 v1(3030,220) ; P1.167@3040,540 3040,530.44 3053,517.44 D22.3@3053,470
  Layer 2 w10: v1(-40,140) 39.69,140 188.19,288.5 211.81,288.5 321.81,178.5 v1(350,178.5) ; v1(110,590) 163.38,590 169.8,596.42 v1(173.58,596.42) ; v1(620,563) 829.53,563 880,512.53 CN4.13@880,430 ; v1(1070,180) 1134,116 2766,116 v1(2810,160) ; v1(3030,220) 3030,371.2 3040,381.2 P1.167@3040,540
IPM_Temperature1: CN1.16 D11.3 P1.183 | length 7035.6
  Top Layer w8: v1(-320,1610) -325.31,1610 -330,1605.31 -330,1570 v1(-270,1510) ; v1(690,1540) v1(690,1620) ; v1(730,1710) 780,1710 790,1720 790,1730 CN1.16@830,1770 ; v1(2540,-130) 2540,-10 2530,0 2530,133.14 2536.94,140.08 2536.94,156.94 v1(2540,160) ; v1(2610,340) 2610,388.18 2617.98,396.15 2617.98,440 2597.98,460 D11.3@2540,460 2540,467 2554,481 2561,481 2570,490 2625.31,490 2640,504.69 P1.183@2640,540
  Layer 2 w8: v1(-320,1610) -385.31,1610 -390,1605.31 -390,-130 v1(2540,-130) ; v1(-270,1510) 334.63,1510 341.35,1503.28 653.28,1503.28 v1(690,1540) ; v1(690,1620) 690,1670 v1(730,1710) ; v1(2540,160) 2629.5,249.5 2629.5,269.11 2610,288.61 v1(2610,340)
IPM_Temperature2: CN2.16 D15.3 P1.177 | length 6561.4
  Top Layer w8: v1(-270,200) v1(-270,720) ; v1(830,1180) CN2.16@830,1306.67 ; 2790,390 P1.177@2790,540
  Top Layer w10: 2790,390 2790,373.64 2837.06,326.59 2845.94,326.59 2891.92,280.61 2891.92,250.47 2893,249.39 D15.3@2893,210 2954.04,210 2974.04,230 v1(2980,230) ; v1(3000,-40) v1(3000,49.5)
  Layer 2 w8: -280,730 -280,1070 -271.5,1078.5 568.99,1078.5 ; v1(-270,200) -270,-94.14 -264.14,-100 2940,-100 v1(3000,-40) ; 830,1080 v1(830,1180)
  Layer 2 w10: -280,730 v1(-270,720) ; 568.99,1078.5 573.35,1074.14 824.14,1074.14 830,1080 ; v1(2980,230) 2980,105.96 3000,85.96 v1(3000,49.5)
IPM_Temperature3: CN3.16 D19.3 P1.166 | length 4897.8
  Top Layer w10: v1(130,550) 130,340 200,270 v1(200,260) ; v1(300,670) 300,690 350,740 v1(350,743.5) ; v1(420,743.5) 420,736.74 425.86,730.88 425.86,730 814.14,730 830,745.86 CN3.16@830,843.33 ; v1(2430,250) v1(2430,400) ; v1(2895.54,426.99) 2898.21,424.31 2915.69,424.31 2920,420 2933.28,433.28 v1(2966.42,433.28) ; P1.166@3090,590 3090,617.37 3112.63,640 3147,640 3207,700 3214,700 3227,713 D19.3@3227,720
  Layer 2 w10: v1(130,550) 159.7,550 221.5,611.8 279.69,670 v1(300,670) ; v1(200,260) 310,150 374.14,150 380,155.86 380,254.14 385.86,260 1044.14,260 1050,254.14 1050,225.86 1055.86,220 2067.37,220 2073.37,226 2195.7,226 2219.7,250 v1(2430,250) ; v1(350,743.5) v1(420,743.5) ; v1(2430,400) 2660,400 2710,450 2860,450 2885.13,424.87 2893.41,424.87 v1(2895.54,426.99) ; v1(2966.42,433.28) 3013.5,480.36 3013.5,623.5 3020,630 3055.5,630 3090,595.5 P1.166@3090,590
IPM_Temperature4: CN4.16 D23.3 P1.165 | length 3514.1
  Top Layer w10: v1(830,230) CN4.16@830,380 ; P1.165@3090,540 3090,534.5 3144.5,480 3220,480 3233,467 D23.3@3233,460 3296.77,460 v1(3340.5,416.27) ; v1(3170,40) 3334.14,40 3347.5,53.36 v1(3347.5,330)
  Layer 2 w10: v1(830,230) 830,123.23 936.23,17 2566.77,17 2570.27,20.5 3147.64,20.5 3167.14,40 v1(3170,40) ; P1.165@3090,534.5 P1.165@3090,540 ; v1(3340.5,416.27) 3340,415.77 3340,340 3347.5,332.5 v1(3347.5,330)
IPM_TerminalDutyU1: CN1.30 J15.5 R39.2 | length 4729.2
  Top Layer w8: J15.5@-160,3420 -130.24,3390.24 -39.12,3390.24 -18,3369.11 -18,3350.89 -85.46,3283.43 -163.87,3283.43 -196.57,3250.72 -196.57,3090.09 22,2871.51 22,2710.89 -55.46,2633.43 -148.3,2633.43 -210,2571.72 -210,2568.28 -251.56,2526.71 -255.01,2526.71 -296.57,2485.15 -296.57,2454.85 -261.72,2420 -258.28,2420 -223.43,2385.15 -223.43,2354.85 -258.28,2320 -261.72,2320 -296.57,2285.15 -296.57,2254.85 -89.72,2048 v1(80,2048) 673.31,2048 680,2054.69 680,2285.11 862.39,2467.5 1055.31,2467.5 1060,2462.81 1060,2444.69 1064.69,2440 1210.76,2440 1248.26,2477.5 R39.2@1290,2477.5 ; v1(80,1780) 80,1694.69 94.69,1680 v1(270,1680) ; CN1.30@480,1770 480,1765.19 v1(565.19,1680)
  Layer 2 w8: v1(80,1780) v1(80,2048) ; v1(270,1680) v1(565.19,1680)
IPM_TerminalDutyU2: CN2.30 J16.5 R43.2 | length 3788
  Top Layer w8: J16.5@-160,2470 50,2260 v1(50,2120) ; v1(-20,1270) v1(90,1270) ; v1(-20,1450) -20,1940 -10,1950 v1(290,1950) ; v1(480,1250) CN2.30@480,1306.67 ; v1(740,2210) v1(820,2210) ; v1(900,2210) v1(1190,2210) ; v1(1290,2210) 1290,2265 1300,2275 R43.2@1290,2285
  Layer 2 w8: v1(-20,1270) v1(-20,1450) ; v1(50,2120) 300,2120 310,2110 400,2020 400,1950 ; v1(90,1270) 238.89,1270 258.89,1250 v1(480,1250) ; v1(290,1950) 400,1950 ; v1(740,2210) 740,1954.69 735.31,1950 400,1950 ; v1(820,2210) v1(900,2210) ; v1(1190,2210) v1(1290,2210)
IPM_TerminalDutyU3: CN3.30
IPM_TerminalDutyU4: CN4.30
IPM_TerminalDutyV1: CN1.28 J15.3 R37.2 | length 5350.3
  Top Layer w8: v1(100,1640) v1(310,1640) ; v1(360,1990) 812.61,1990 850,2027.39 850,2435.31 854.69,2440 v1(900,2440) ; CN1.28@530,1770 610,1690 v1(610,1640) ; v1(900,2520) 900,2710 920,2730 1285.31,2730 1290,2725.31 R37.2@1290,2670 ; R37.2@1291.26,2660 1282.25,2650.99 1282.25,2571.62 1286.94,2566.94 1303.06,2566.94 v1(1310,2560)
  Layer 2 w8: J15.3@-160,3320 -102.34,3377.66 1212.34,3377.66 1214.69,3375.31 1310,3280 1313,3277 1313,2563 v1(1310,2560) ; v1(100,1640) 100,1761.11 110,1771.11 110,1985.31 114.69,1990 345.31,1990 349.34,1994.03 355.97,1994.03 v1(360,1990) ; v1(310,1640) v1(610,1640) ; v1(900,2440) v1(900,2520)
IPM_TerminalDutyV2: CN2.28 J16.3 R42.2 | length 3792.4
  Top Layer w8: v1(-130,1140) -130,1865.31 -125.31,1870 v1(-60,1870) ; v1(50,1870) 280,1870 v1(300,1890) ; CN2.28@530,1306.67 530,1210 570,1170 v1(610,1170) ; v1(720,1890) 750,1920 v1(1230,1920) ; v1(1230,2018.47) 1230,2024.63 1290,2084.63 R42.2@1290,2092.5
  Layer 2 w8: J16.3@-160,2370 -60,2270 v1(-60,1870) v1(50,1870) ; v1(-130,1140) 580,1140 v1(610,1170) ; v1(300,1890) v1(720,1890) ; v1(1230,1920) v1(1230,2018.47)
IPM_TerminalDutyV3: CN3.28
IPM_TerminalDutyV4: CN4.28
IPM_TerminalDutyW1: CN1.26 J15.1 R36.2 | length 4020.6
  Top Layer w8: CN1.26@580,1770 670,1680 774,1680 v1(830,1624) ; v1(650,2770) 652.69,2770 662.69,2760 1275.11,2760 1332,2703.11 1332,2402.89 1309.11,2380 1200,2380 1189.37,2369.37 R36.2@1189.37,2290 1225.31,2290 1230,2285.31 1230,2213.89 1319.69,2124.2 v1(1319.69,2022.19) ; v1(1050,1630) 1285.31,1630 1290,1634.69 v1(1290,1930)
  Layer 2 w8: J15.1@-160,3220 645.31,3220 650,3215.31 v1(650,2770) ; v1(830,1624) 836,1630 v1(1050,1630) ; v1(1290,1930) 1319.69,1959.69 v1(1319.69,2022.19)
IPM_TerminalDutyW2: CN2.26 J16.1 R40.2 | length 3538.1
  Top Layer w8: v1(-160,1110) v1(-160,1960) ; J16.1@-160,2270 -40,2150 v1(10,2150) ; CN2.26@580,1306.67 585.02,1301.65 585.02,1274.98 670,1190 v1(680,1190) ; v1(710,2100) v1(820,2100) ; v1(900,2100) R40.2@1110.63,2100
  Layer 2 w8: v1(-160,1110) 600,1110 v1(680,1190) ; v1(-160,1960) J16.1@-160,2270 ; v1(10,2150) 660,2150 v1(710,2100) ; v1(820,2100) v1(900,2100)
IPM_TerminalDutyW3: CN3.26
IPM_TerminalDutyW4: CN4.26
IPM_VDC_BUS1: C32.2 D6.3 P1.188 R17.2 TP5.1 | length 4174.2
  Top Layer w8: R17.2@1761.26,3020 1761.26,2968.74 1770,2960 v1(1780,2960) 1880,2960 TP5.1@1940,3020 ; C32.2@1779.37,2760 1780,2760.63 v1(1780,2890) 1991.21,2890 2031.21,2930 v1(2200,2930) ; D6.3@2140,2770 2147,2777 2220,2777 ; v1(2220,2750) 2220,2777 ; v1(2230,990) 2288.43,1048.43 v1(2291.57,1048.43) ; v1(2290,880) 2290,724.33 2300,714.33 v1(2300,710) ; v1(2390,1510) v1(2480,1510) ; v1(2520,1808) v1(2520,1860) ; v1(2520,2370) 2520,2772.31 2515.31,2777 2220,2777
  Layer 2 w8: v1(1780,2890) v1(1780,2960) ; v1(2200,2930) 2200,2770 v1(2220,2750) ; v1(2230,990) 2230,1122.16 2278,1170.16 2278,1398 v1(2390,1510) ; v1(2290,880) 2288,882 2288,1044.87 v1(2291.57,1048.43) ; v1(2300,710) 2380,630 2505.5,630 2540,595.5 P1.188@2540,590 ; v1(2480,1510) 2480,1731.11 2520,1771.11 v1(2520,1808) ; v1(2520,1860) v1(2520,2370)
IPM_VDC_BUS2: C38.2 D7.3 P1.182 R24.2 TP6.1 | length 3678.2
  Top Layer w8: D7.3@2220,2520 C38.2@2079.37,2520 2079.37,2330 R24.2@2089.37,2320 2632.69,2320 2637.37,2324.69 2637.37,2337.37 v1(2640,2340) ; v1(2639.02,1040) 2640,1039.02 2640,860 v1(2660,840) ; v1(2640,1170) 2730,1260 v1(2770,1260) ; v1(2663,620) 2670,620 2690,600 P1.182@2690,590 ; v1(2733,2340) 2730,2337 2730,1868.89 2770,1828.89 v1(2770,1372) ; TP6.1@2820,60 2830.38,60 2850.38,40 2870,40 2890,60 2890,122 v1(2891,123) ; v1(2820,500) 2820,430 2813.31,423.31 2813.31,371.54 2824.86,360 2830,360 2848.41,341.59 2852.15,341.59 2920,273.74 2917.98,271.72 2917.98,263.06 v1(2914.92,260)
  Layer 2 w8: v1(2639.02,1040) 2640,1040.98 v1(2640,1170) ; v1(2640,2340) v1(2733,2340) ; v1(2660,840) 2660,830 2663,827 v1(2663,620) ; P1.182@2690,590 2710,590 2717.5,582.5 2717.5,525.18 2752.68,490 2815.31,490 2815.31,490.98 2820,495.67 v1(2820,500) ; v1(2770,1260) v1(2770,1372) ; v1(2891,123) 2891,236.08 v1(2914.92,260)
LED1: P1.11 R32.2 | length 107.7
  Top Layer w8: P1.11@3415,2425 3515.63,2425 R32.2@3520.63,2420
LED2: P1.12 R33.2 | length 137.7
  Top Layer w8: R33.2@3229.37,2420 3234.37,2425 P1.12@3365,2425
LED3: P1.13 R51.2 | length 897.2
  Top Layer w8: v1(3680,1823) 3683,1823 3716.44,1856.44 3744.31,1856.44 3760,1872.13 R51.2@3760,1880
  Layer 2 w8: P1.13@3415,2375 3505,2375 3520,2360 3520,1860 3560,1820 3677,1820 v1(3680,1823)
LED4: P1.14 R52.2 | length 485
  Top Layer w8: R52.2@3229.37,2020 3305.31,2020 3310,2024.69 3310,2370 3315,2375 P1.14@3365,2375
MQEP1A: J1.2 P1.21 | length 3640.4
  Top Layer w8: P1.21@3415,2175 3420.19,2175 3433.69,2188.5 3435.62,2188.5 3467.12,2220 3670,2220 3690,2240 3785.31,2240 3790,2244.69 3790,2611.31 3794.69,2616 4219.9,2616 4237.9,2598 4558,2598 4570,2610 v1(4570,2620.05) ; v1(4570,2870) 4570,3100 4575,3105 5615,3105 5630,3120 5630,3445.31 5634.69,3450 J1.2@5820,3450
  Layer 2 w8: v1(4570,2620.05) v1(4570,2870)
MQEP1B: J1.4 P1.22 | length 3771.6
  Top Layer w8: P1.22@3365,2175 3370.5,2175 3398,2202.5 3429.82,2202.5 3467.32,2240 3650,2240 3680,2270 3750,2270 3760,2280 3760,2625.31 3764.69,2630 4507.31,2630 4517.26,2620.05 v1(4520,2620.05) ; v1(4520,2870) 4520,3115.31 4524.69,3120 5605.31,3120 5610,3124.69 5610,3545.31 5614.69,3550 J1.4@5820,3550
  Layer 2 w8: v1(4520,2620.05) v1(4520,2870)
MQEP1S: J1.8 P1.23 | length 4097.7
  Top Layer w8: P1.23@3415,2125 3490,2200 3690,2200 3700,2210 3805.31,2210 3810,2214.69 3810,2595.31 3814.69,2600 4216.1,2600 4232.1,2584 4574,2584 v1(4610,2620) ; v1(4610,2870) 4610,3085.31 4614.69,3090 5640,3090 5680,3130 5680,3380 5700,3400 5855.31,3400 5860,3404.69 5860,3580 5830,3610 5780,3610 5760,3630 5760,3735.31 5774.69,3750 J1.8@5820,3750
  Layer 2 w8: v1(4610,2620) v1(4610,2870)
MQEP1Z: J1.6 P1.24 | length 4006.5
  Top Layer w8: P1.24@3365,2125 3375.1,2125 3380.83,2119.27 3383.41,2119.27 3400.18,2102.5 3429.82,2102.5 3507.32,2180 3730,2180 3740,2190 3825.31,2190 3830,2194.69 3830,2575.31 3834.69,2580 4216.3,2580 4226.3,2570 4590,2570 4610,2570 4650,2610 v1(4650,2620) ; v1(4650,2870) 4650,3065.31 4654.69,3070 5660,3070 5720,3130 5720,3370 5730,3380 5890,3380 5890,3407.06 5886.59,3410.47 5886.33,3410.47 5880.47,3416.33 5880.47,3550 cw(c5920,3550) 5884.23,3566.81 ; J1.6@5820,3650 5889.22,3580.78 5889.22,3577.51 cw(c5881.22,3577.47) 5889.22,3577.43 5884.23,3566.81
  Layer 2 w8: v1(4650,2620) v1(4650,2870)
MQEP2A: J10.2 P1.25 | length 2867
  Top Layer w8: P1.25@3415,2075 5135,2075 5140,2070 5160,2070 5320,1910 5610,1910 5620,1920 5620,2095.31 5629.21,2104.53 5865.31,2104.53 5870,2099.84 5870,2010 5825,1965 J10.2@5820,1965
MQEP2B: J10.4 P1.26 | length 2715.8
  Top Layer w8: P1.26@3365,2075 3370.5,2075 3393,2052.5 3429.82,2052.5 3437.32,2060 5130,2060 5306,1884 5635.31,1884 5640,1888.69 5640,2060.31 5644.69,2065 J10.4@5820,2065
MQEP2S: J10.8 P1.27 | length 3263.9
  Top Layer w8: P1.27@3415,2025 3445,2025 3460,2040 5130,2040 5292.99,1877.01 5292.99,1874.69 5297.68,1870 5985.31,1870 5990,1874.69 5990,2290 5974,2306 5861,2306 J10.8@5820,2265